# Altium PCB PCB.PcbDoc
Units mm, origin at the board's own origin, x right, y up, seen from the top; angles counter-clockwise.
Board outline 50.04 x 50.04 mm, 2 copper layers (Top Layer, Bottom Layer); 15 components, 9 nets, 41 pads, 0 vias.
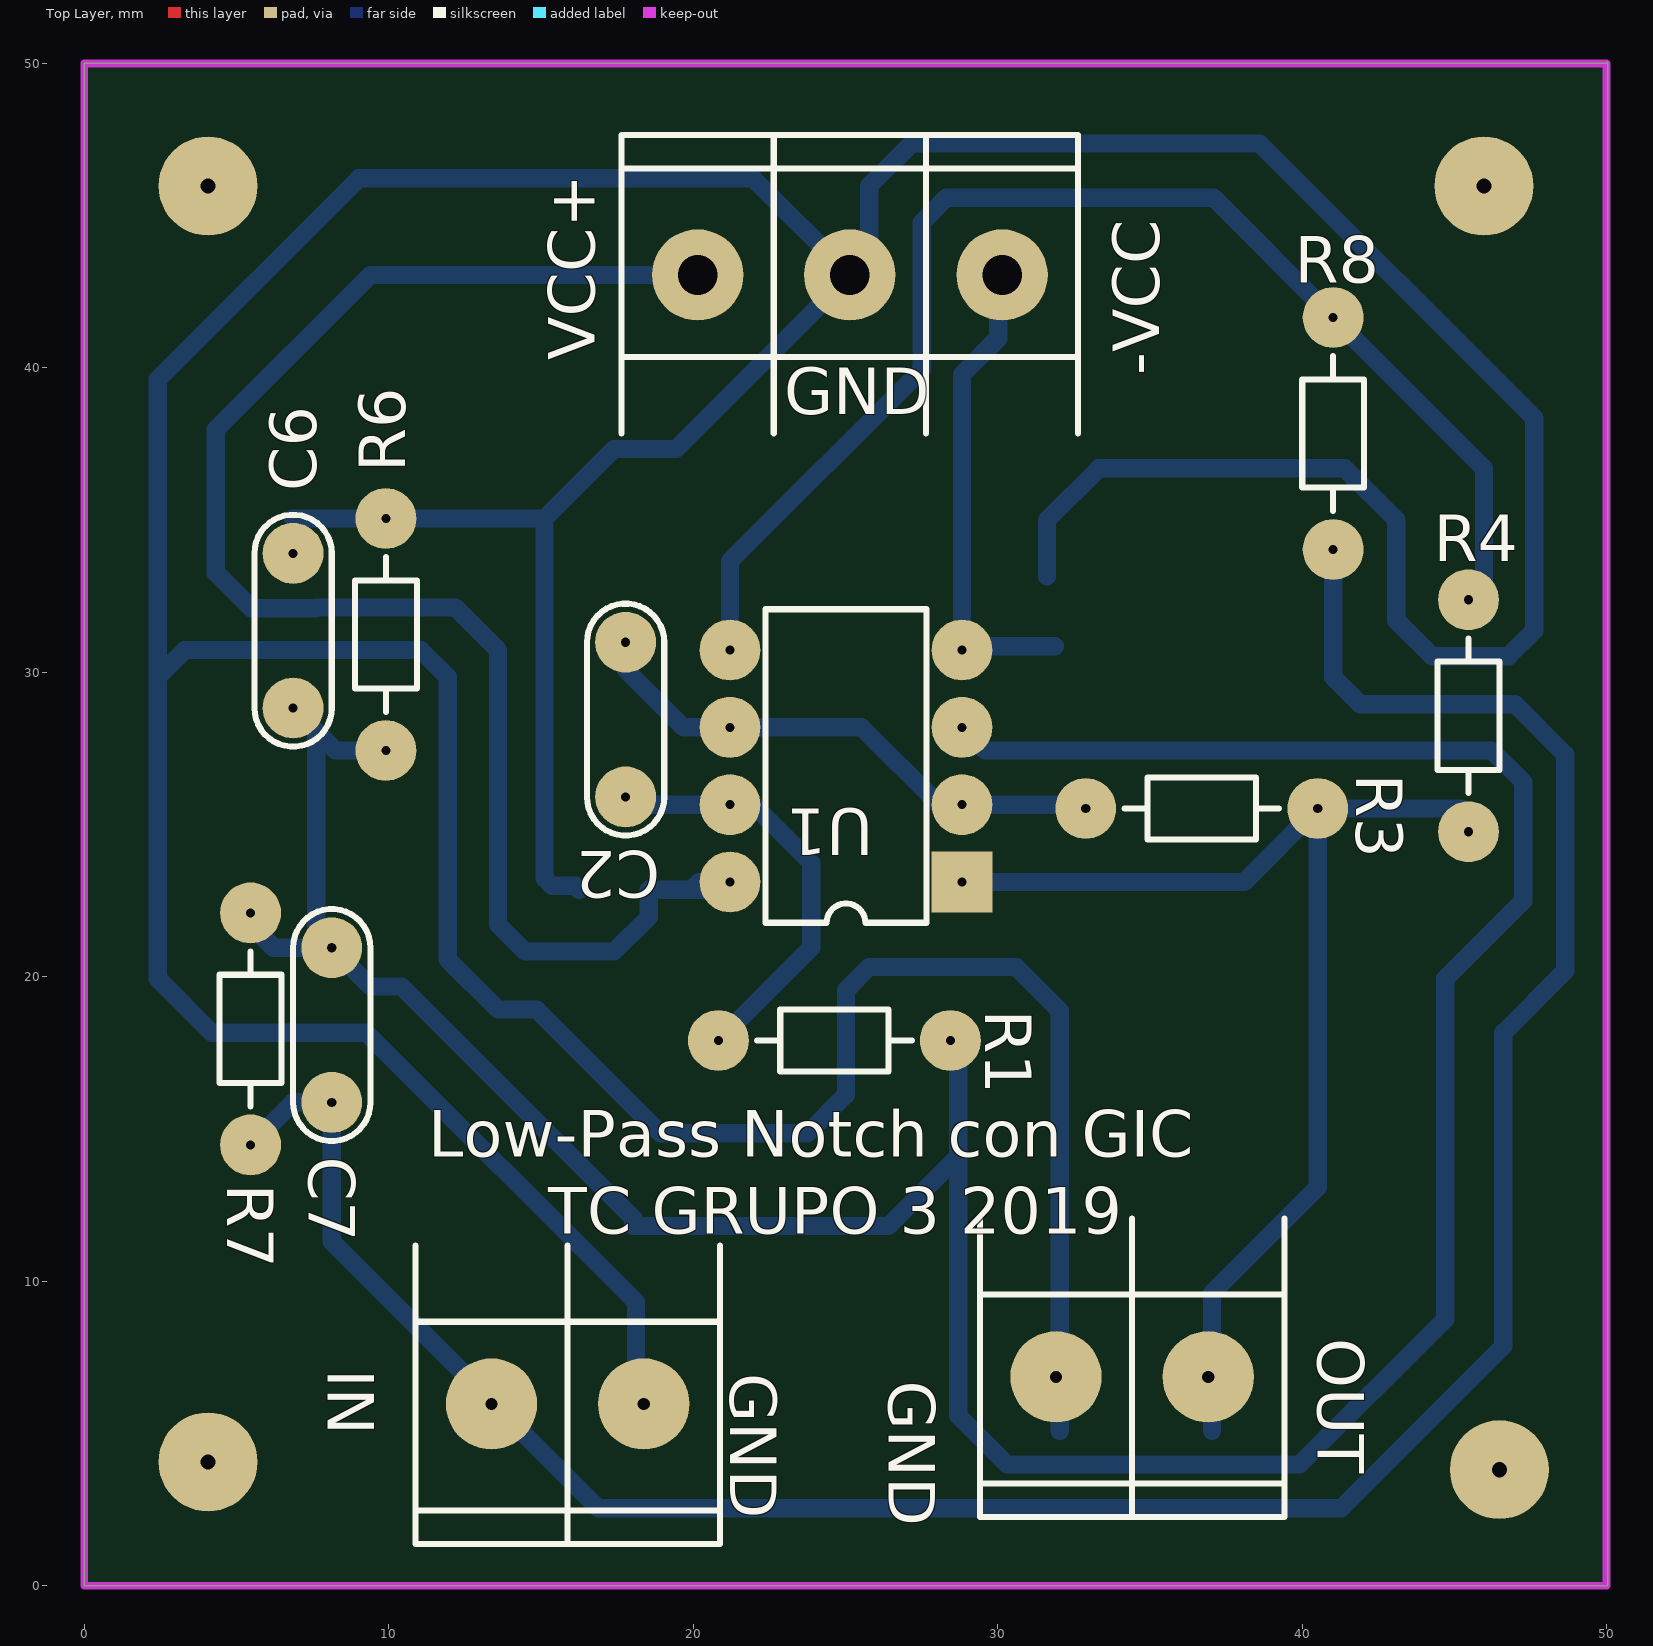
[diagram p0: Top Layer view]
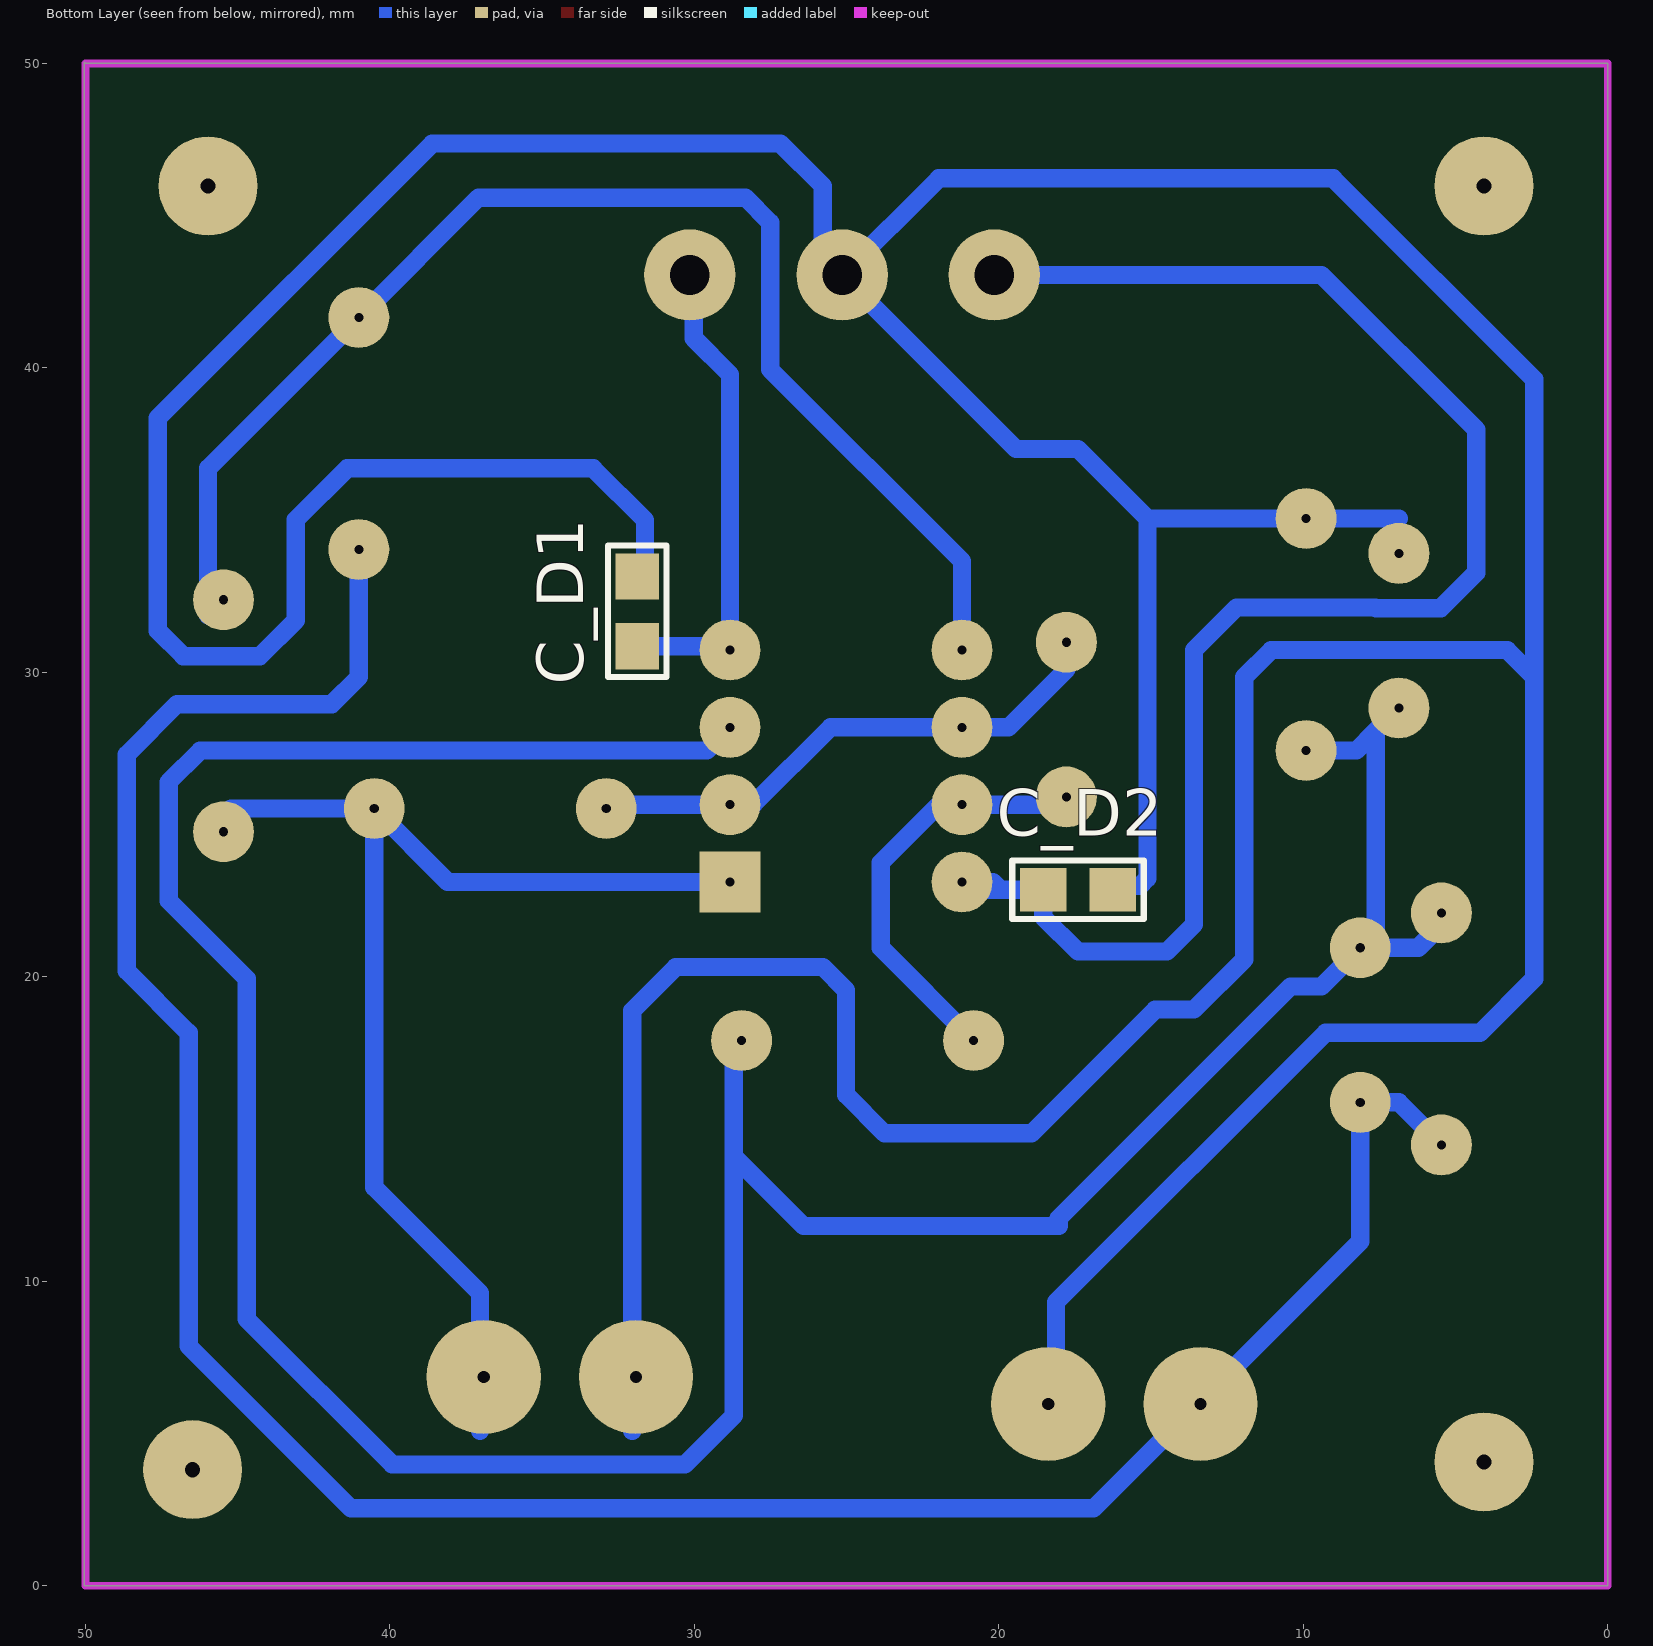
[diagram p1: Bottom Layer view, seen from below]
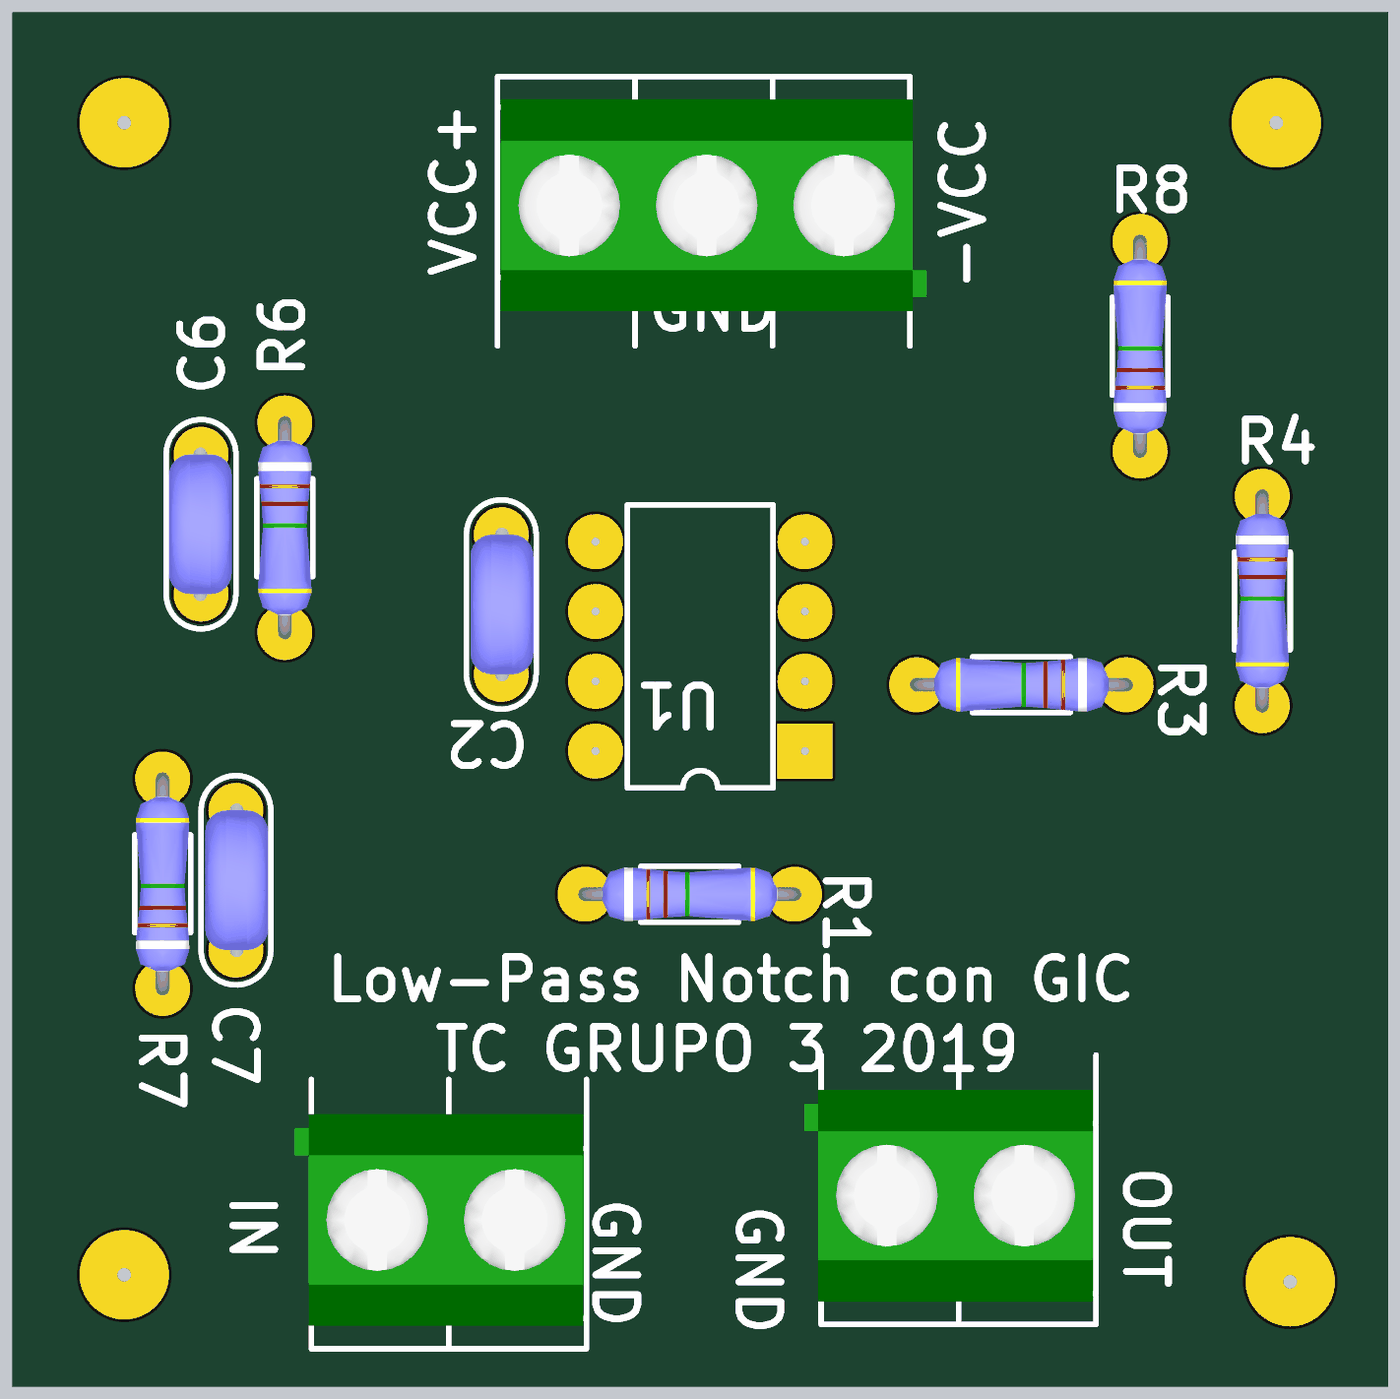
[diagram p2: 3D render of the assembled board from above, using the file's embedded part models]

## Layer stack, top to bottom
Top Solder: solder mask 0.0102, Solder Resist, Dk 3.5
Top Layer: signal copper 0.0356
Dielectric 1: dielectric 0.32, FR-4, Dk 4.8
Bottom Layer: signal copper 0.0356
Bottom Solder: solder mask 0.0102, Solder Resist, Dk 3.5

## Board outline
0,0 50.038,0 50.038,50.038 50,50 0,50

## Design rules (kind name [scope] priority, off if disabled: settings)
Clearance [All] p1: gap=0.5
PolygonConnect [All] p1: connectstyle=Relief reliefconductorwidth=0.254 reliefentries=4 polygonreliefangle="90 Angle" airgapwidth=0.254
RoutingLayers [All] p1: top layer_v5=FALSE bottom layer_v5=TRUE
RoutingVias [All] p1: holewidth=0.711 width=1.27 viastyle="Through Hole" minholewidth=0.711 minwidth=1.27 maxholewidth=0.711 maxwidth=1.27
SolderMaskExpansion [All] p1: expansion=0.102
Width [All] p1: maxlimit=0.6 minlimit=0.6 preferedwidth=0.6
29 further rules are at their usual default settings.

## Components (designator, comment, footprint, x,y, rotation, side; value= is the part's Value field where it differs from the comment)
C2 "CAP" CAP200 17.78,28.448 r90 top
C6 "CAP" CAP200 6.858,31.369 r270 top
C7 "CAP" CAP200 8.128,18.415 r90 top
C_D1 "CAP" 0805 31.877,32.004 r90 bottom
C_D2 "CAP" 0805 17.399,22.86 r0 bottom
IN "BORNERA 2" BORNERA2 15.875,5.969 r90 top
OUT "BORNERA 2" BORNERA2 34.417,6.858 r90 top
R1 "RES" RES300 20.828,17.907 r0 top
R3 "RES" RES300 40.513,25.527 r180 top
R4 "RES" RES300 45.466,32.385 r270 top
R6 "RES" RES300 9.906,35.052 r270 top
R7 "RES" RES300 5.461,14.478 r90 top
R8 "RES" RES300 41.021,34.036 r90 top
U1 "TL082JG" JG008 25.019,26.924 r90 top
VCC+ "BORNERA 3" BORNERA3 25.146,43.053 r270 top (schematic designator POWER)

## Footprints (in the part's own frame and the unit in brackets; to place one, negate y for a bottom-side part, rotate by r counter-clockwise, add the part's x,y. Pads: shape width x height; smd on the part's side, far side on the other; paste and mask are expansions set on the pad)
0805 [mil] "Pasivo 0805"
  rect 60x56 smd: 1(-45,0) 2(45,0)
  silkscreen extent -85,-38 85,38, body extent -40,-25 39,25, height 15
BORNERA2 [mm] "Bornera con Tornillos 5mm separación"
  round 3 / inner round 3.75 / far side round 3.75 hole 0.4: 1(0,2.5) 2(0,-2.5)
  silkscreen extent -4.6,-5 5.2,5, body extent -3.76,-4.89 3.94,5.61, height 10
BORNERA3 [mm] "Bornera con Tornillos 5mm separación"
  round 3 hole 1.3: 1(0,5) 2(0,0) 3(0,-5)
  silkscreen extent -4.6,-7.5 5.2,7.5, body extent -3.76,-7.39 3.94,8.11, height 10.05
CAP200 [mm]
  round 2 hole 0.3: 1(-2.54,0) 2(2.54,0)
  silkscreen extent -3.81,-1.27 3.81,1.27, body extent -2.79,-1.17 2.79,1.12, height 6.24
JG008 [mm] "DIP; 8 Leads; Row Spacing 7.62 mm; Pitch 2.54 mm"
  rect 2x2 hole 0.3: 1(-3.81,-3.81)
  round 2 hole 0.3: 2(-1.27,-3.81) 3(1.27,-3.81) 4(3.81,-3.81) 5(3.81,3.81) 6(1.27,3.81) 7(-1.27,3.81) 8(-3.81,3.81)
  silkscreen extent -5.15,-2.65 5.15,2.65
RES300 [mm]
  round 2 hole 0.3: 1(0,0) 2(7.62,0)
  silkscreen extent 1.27,-1.02 6.35,1.02, body extent -0.25,-0.97 7.87,0.97, height 2.01

## Part data
U1: "JFET-Input Operational Amplifier"

## Free pads (board coordinates)
  round 3.25 hole 0.5: 0(4.064,4.064) 0(4.064,45.974) 0(45.974,45.974) 0(46.482,3.81)

## Nets (pads, with @x,y where several pads share a name; then routed paths per layer and width w, separated by ;. In a path a pad name is that pad's centre, name@x,y a point inside that pad or via, vN(x,y) a via of type N, cw(c..) or ccw(c..) an arc to the next point about the centre after c; other vN are vias at no path point)
GND: C6.1 C_D1.2 C_D2.1 IN.2 OUT.1 R6.1 VCC+.2 | length 226.1
  Bottom Layer w0.6: 2.413,29.845 3.302,30.734 11.049,30.734 11.938,29.845 11.938,20.574 13.589,18.923 14.859,18.923 18.923,14.859 23.749,14.859 25.019,16.129 25.019,19.558 25.781,20.32 30.607,20.32 32.044,18.883 OUT.1@32.044,5.08 ; 6.858,35.052 R6.1 15.113,35.052 ; C_D2.1 16.129,22.987 15.367,22.987 15.113,23.241 15.113,35.052 ; IN.2@18.121,4.953 18.121,9.311 9.271,18.161 4.191,18.161 2.413,19.939 2.413,39.624 9.017,46.228 21.971,46.228 VCC+.2 ; C_D1.2@31.623,33.147 31.623,35.001 33.325,36.703 41.402,36.703 43.091,35.014 43.091,31.712 44.272,30.531 46.787,30.531 47.625,31.369 47.625,38.354 38.608,47.371 27.178,47.371 25.781,45.974 25.781,43.688 VCC+.2 ; 15.113,35.052 17.399,37.338 19.431,37.338 VCC+.2
NetC2_1: C2.1 R1.1 U1.7 | length 14
  Bottom Layer w0.6: C2.1@17.78,25.654 U1.7 21.971,25.654 23.876,23.749 23.876,20.955 R1.1
NetC2_2: C2.2 R3.2 U1.2 U1.6 | length 17.9
  Bottom Layer w0.6: C2.2 17.78,30.099 19.685,28.194 U1.6 25.527,28.194 28.067,25.654 U1.2 32.766,25.654 R3.2
NetC6_2: C6.2 C7.2 R1.2 R6.2 R7.2 U1.3 | length 108.6
  Bottom Layer w0.6: R7.2@5.271,21.907 6.223,20.955 C7.2 ; C6.2 7.62,28.067 ; R6.2 8.255,27.432 7.62,28.067 ; R1.2 28.702,17.653 28.702,14.097 ; U1.3 29.591,27.432 46.228,27.432 47.266,26.394 47.266,22.501 44.704,19.939 44.704,8.763 39.921,3.98 30.31,3.98 28.702,5.588 28.702,14.097 ; 7.62,28.067 7.62,21.463 C7.2 ; C7.2 9.398,19.685 10.414,19.685 18.034,12.065 18.034,11.811 26.416,11.811 28.702,14.097
NetC7_1: C7.1 IN.1 R7.1 R8.1 | length 85.3
  Bottom Layer w0.6: R7.1 6.858,15.875 C7.1 8.128,11.303 16.891,2.54 41.275,2.54 46.609,7.874 46.609,18.161 48.641,20.193 48.641,27.305 46.99,28.956 41.91,28.956 41.021,29.845 R8.1
NetOUT_2: OUT.2 R3.1 R4.2 U1.1 | length 40.2
  Bottom Layer w0.6: U1.1 38.1,23.114 R3.1 ; OUT.2@37.044,5.08 37.044,9.612 40.513,13.081 R3.1 ; R4.2@45.847,24.892 45.212,25.527 R3.1
NetR4_1: R4.1 R8.2 U1.5 | length 43.9
  Bottom Layer w0.6: U1.5 21.209,33.655 27.508,39.954 27.508,44.755 ; 27.508,44.78 28.321,45.593 37.084,45.593 R8.2 45.974,36.703 R4.1@45.974,31.877
VCC+: C_D2.2 U1.8 VCC+.3 | length 52.1
  Bottom Layer w0.6: C_D2.2 18.542,21.971 17.399,20.828 14.478,20.828 13.589,21.717 13.589,30.737 12.195,32.131 7.626,32.131 7.604,32.109 5.483,32.109 4.318,33.274 4.318,37.973 9.398,43.053 VCC+.3@19.892,43.053 ; C_D2.2@18.923,22.86 19.939,22.86 ; U1.8@21.209,22.86 19.939,22.86 ; U1.8 20.193,23.114 19.939,22.86
VCC-: C_D1.1 U1.4 VCC+.1 | length 16
  Bottom Layer w0.6: VCC+.1@30.019,43.18 30.019,40.974 28.829,39.784 U1.4 28.956,30.861 C_D1.1

## Keep-outs
Keep-Out Layer:
  lines w0.254: 0,50 50,50 50,0 ; 0,50 0,50 ; 0,50 0,0 50,0 ; 50,0 50,0

## Silkscreen, mask and mechanical layers (free items; w line width, h text height)
Top Overlay:
  text "-VCC" at 35.306,39.751 h1.52 r90
  text "GND" at 22.987,38.481 h1.52
  text "Low-Pass Notch con GIC" at 11.303,14.097 h1.52
  text "TC GRUPO 3 2019" at 15.24,11.557 h1.52
  text "GND" at 21.209,6.985 h1.52 r270
  text "GND" at 26.416,6.731 h1.52 r270